# Altium PCB PCB2.PcbDoc
Units mil, origin at the board's own origin, x right, y up, seen from the top; angles counter-clockwise.
Board outline 3975 x 1155 mil, 2 copper layers (Top Layer, Bottom Layer); 12 components, 19 nets, 65 pads, 5 vias.
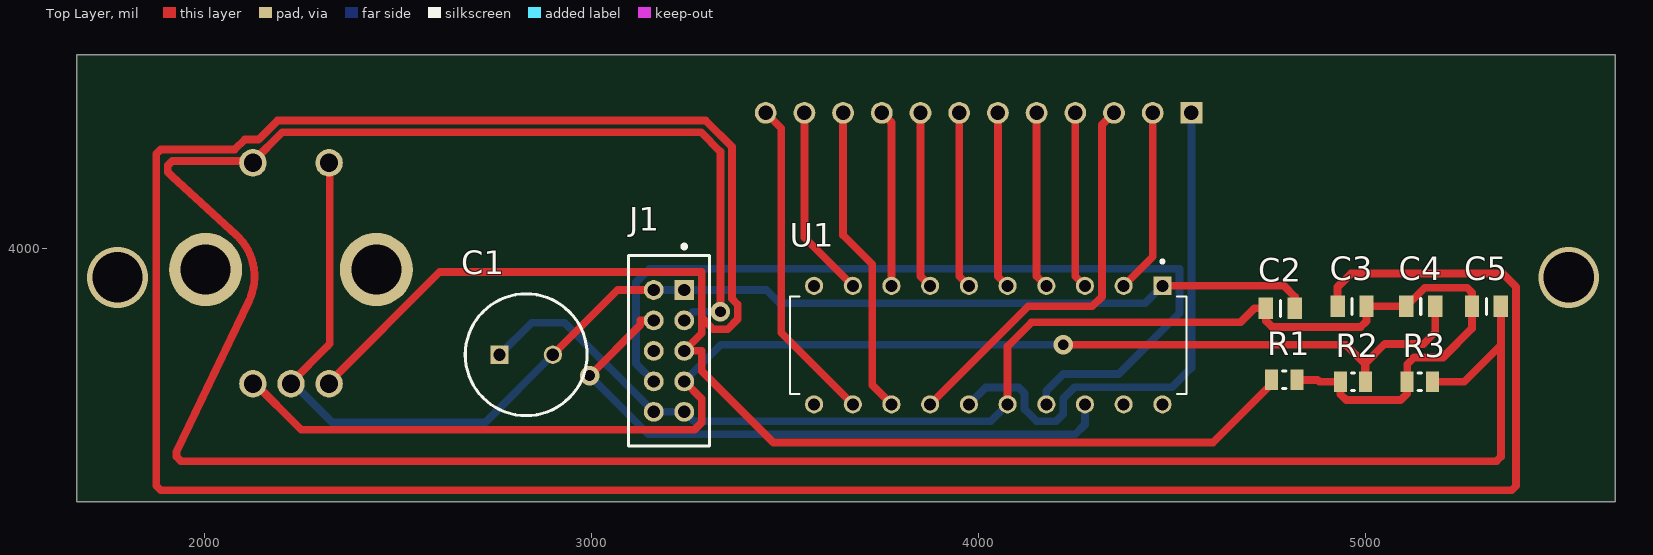
[diagram p0: Top Layer view]
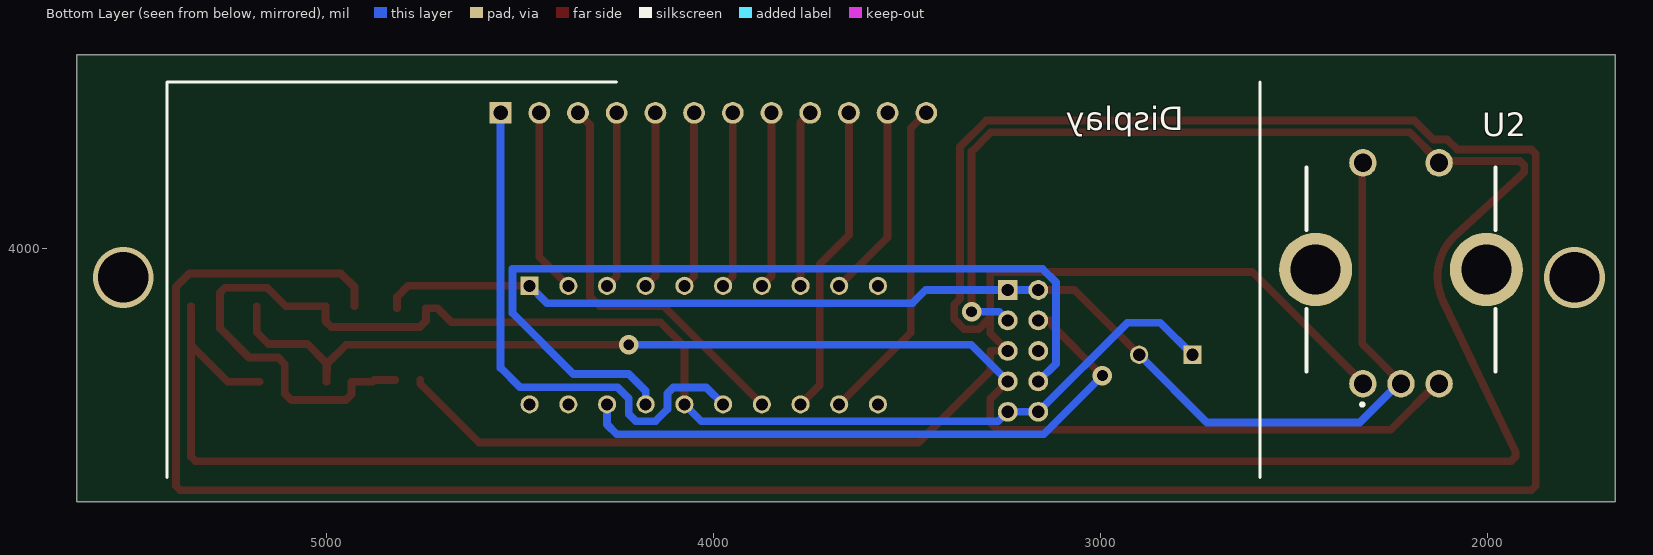
[diagram p1: Bottom Layer view, seen from below]
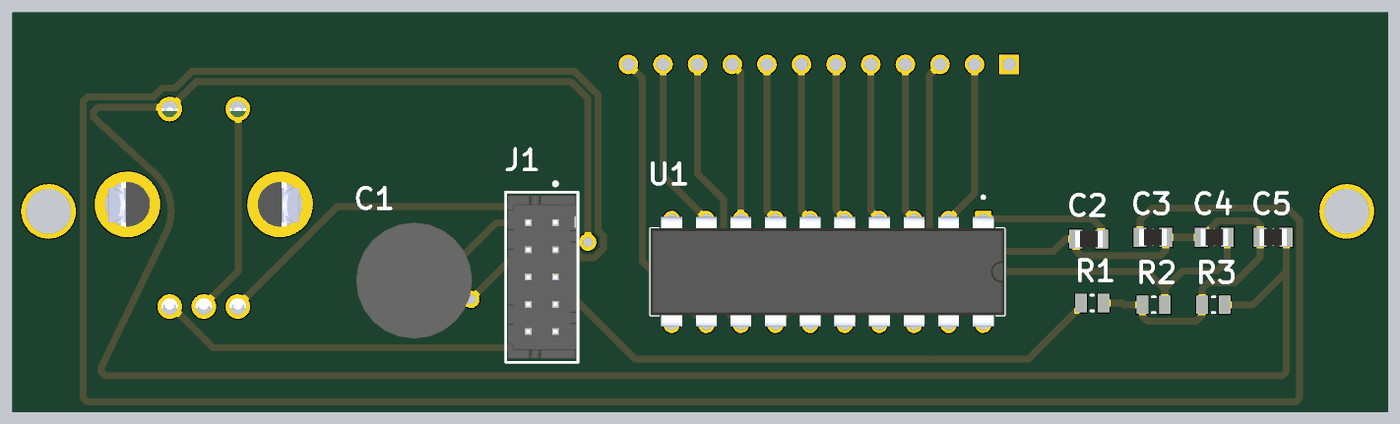
[diagram p2: 3D render of the assembled board from above, using the file's embedded part models]

## Layer stack, top to bottom
Top Solder: solder mask 0.4, Solder Resist, Dk 3.5
Top Layer: signal copper 1.4
Dielectric 1: dielectric 12.6, FR-4, Dk 4.8
Bottom Layer: signal copper 1.4
Bottom Solder: solder mask 0.4, Solder Resist, Dk 3.5

## Board outline
1670,3345 5645,3345 5645,4500 1670,4500

## Design rules (kind name [scope] priority, off if disabled: settings)
Clearance [All] p1: gap=10 ignorepadtopadclearanceinfootprint=FALSE
PolygonConnect [All] p1: connectstyle=Relief reliefconductorwidth=10 reliefentries=4 polygonreliefangle="90 Angle" airgapwidth=10
RoutingVias [All] p1: holewidth=28 width=50 viastyle="Through Hole" minholewidth=28 minwidth=50 maxholewidth=28 maxwidth=50
SolderMaskExpansion [All] p1: expansion=4 istentingtop=FALSE
Width [All] p1: maxlimit=50 minlimit=15 preferedwidth=20 minimp=50.000000 maximp=50.000000 favimp=50.000000
30 further rules are at their usual default settings.

## Components (designator, comment, footprint, x,y, rotation, side; value= is the part's Value field where it differs from the comment)
C1 "100uF 50V" "Elco 100uF 50V" 2762.2,3725 r0 top
C2 "100 nF" 0805 4780,3845 r0 top
C3 "10 nF" 0805 4965,3850 r180 top
C4 "10 nF" 0805 5142.6,3850 r0 top
C5 "10 nF" 0805 5312.4,3850 r0 top
Display "DP1" 7sigment 4250,4350 r270 bottom (schematic designator 1)
J1 "DF11-10DP-2DSA(24)" "FP-DF11-10DP-2DSA_24-MFG - duplicate" 3200,3735 r270 top
R1 "200E" registor 4790,3660 r0 top
R2 "200E" registor 4967.48,3655 r180 top
R3 "200E" registor 5140,3655 r180 top
U1 "TM1637" TM1637 4025,3750 r270 top
U2 "PEC11R-4225F-S0024" PEC12R-4XXXF-SXXXX_1 2223.43,3945.28 r180 bottom

## Footprints (in the part's own frame and the unit in brackets; to place one, negate y for a bottom-side part, rotate by r counter-clockwise, add the part's x,y. Pads: shape width x height; smd on the part's side, far side on the other; paste and mask are expansions set on the pad)
7sigment [mm]
  rect 1.425x1.425 hole 0.95: 1(0,-7.62)
  round 1.425 hole 0.95: 2(0,-5.08) 3(0,-2.54) 4(0,0) 5(0,2.54) 6(0,5.08) 7(0,7.62) 8(0,10.16) 9(0,12.7) 10(0,15.24) 11(0,17.78) 12(0,20.32)
  silkscreen extent -2.02,-29.53 23.93,42.23
0805 [mm]
  rect 0.95x1.4 smd: 1(-0.95,0) 2(0.95,0)
  silkscreen extent 0,-0.53 0,0.53, body extent -1,-0.63 1,0.63, height 0.6
"Elco 100uF 50V" [mm]
  rect 1.2x1.2 hole 0.8: 1(0,0)
  round 1.2 hole 0.8: 2(3.5,0)
  silkscreen extent -2.25,-4 5.75,4, body extent -2.5,-4.25 6,4.25, height 12.5
"FP-DF11-10DP-2DSA_24-MFG - duplicate" [mm]
  rect 1.3x1.3 hole 0.8 paste-2539.97 mask+0: 1(-4,1)
  round 1.3 hole 0.8 paste-2539.97 mask+0: 2(-4,-1) 3(-2,1) 4(-2,-1) 5(0,1) 6(0,-1) 7(2,1) 8(2,-1) 9(4,1) 10(4,-1)
  silkscreen extent -6.97,-2.65 6.25,2.65, body extent -6.35,-2.75 6.35,2.75, height 0.25
PEC12R-4XXXF-SXXXX_1 [mm]
  round 1.8 hole 1.2: 1(-2.5,-7.5) 2(2.5,-7.5) 3(0,-7.5) 4(-2.5,7) 5(2.5,7)
  round 4.8 hole 3.28: 6(5.6,0) 7(-5.6,0)
  silkscreen extent -6.2,-8.95 6.2,6.7, body extent -7,-7.75 6.99,7.15, height 31.51
registor [mm] "Chip Resistor, 2-Leads, Body 2.00x1.25mm, IPC High Density"
  rect 0.85x1.35 smd: 1(-0.825,0) 2(0.825,0)
  silkscreen extent -0.1,-0.58 0.1,0.58, body extent -1.1,-0.72 1.1,0.72, height 0.5
TM1637 [mm]
  rect 1.19x1.19 hole 0.79: 1(-3.89,11.43)
  round 1.19 hole 0.79: 2(-3.89,8.89) 3(-3.89,6.35) 4(-3.89,3.81) 5(-3.89,1.27) 6(-3.89,-1.27) 7(-3.89,-3.81) 8(-3.89,-6.35) 9(-3.89,-8.89) 10(-3.89,-11.43) 11(3.89,-11.43) 12(3.89,-8.89) 13(3.89,-6.35) 14(3.89,-3.81) 15(3.89,-1.27) 16(3.89,1.27) 17(3.89,3.81) 18(3.89,6.35) 19(3.89,8.89) 20(3.89,11.43)
  silkscreen extent -5.58,-13 3.2,13, body extent -4.03,-13 4.03,13, height 4.31

## Part data
C1: library part "condensator 100uF 50V", Manufacturer="AVX Interconnect / Elco", Part Number=02015A270JAT2A
C2 C3 C4 C5: library part "Condensator 0805", "Chip Multilayer Ceramic Capacitors for General Purpose, 0805, 10uF, X5R, 15%, 10%, 25V", Capacitance=10uF, Case Code (Imperial)=0805, Case Code (Metric)=2012, Dielectric=X5R, Max Operating Temperature=85°C, Min Operating Temperature=-55°C, Package Quantity=1, Tolerance=10%, Voltage=25V, Case/Package=0805, Depth=1.25mm, Height=1.25mm, Lead Free="Lead Free", Length=2mm, Material=Ceramic, Mount="Surface Mount", Packaging="Tape and Reel", Radiation Hardening=No, Termination=SMD/SMT, Thickness=0.053inch, Voltage Rating=25V, Voltage Rating (DC)=25V, Width=0.049inch
Display: library part 7sigment
J1: library part CMP-11610-000008-1, "CONN HEADER VERT 10POS 2MM", Current Rating=2A, Manufacturer=Hirose, Temperature="-40°C to +85°C", Temperature Range High=+85°C, Temperature Range Low=-40°C, Voltage Rating=250V, Automotive=No, Category=Conn, ComponentLink2Description=Datasheet, ComponentLink2URL=https://www.hirose.com/product/document?clcode=CL0543-0520-0-24&productname=DF11-10DP-2DSA(24)&series=DF11&documenttype=Catalog&lang=en&documentid=D31688_en, Conn Gender=Male, Conn Orientation=Straight, Contact Material=Tin,Nickel, Device Class L1=Connectors, Device Class L2="Headers and Wire Housings", Device Class L3=unset, Digikey Description="CONN HEADER VERT 10POS 2MM", Footprint Url=https://www.hirose.com/product/document?clcode=CL0543-0520-0-24&productname=DF11-10DP-2DSA(24)&series=DF11&documenttype=2DDrawing&lang=en&documentid=0000995333, Height=6.9mm, Lead Free=Yes, Manufacturer Part Number=DF11-10DP-2DSA(24), Mouser Description="Headers & Wire Housings 10P STRT HEADER THRU HL,BD MNT,SN", Number Of Contacts=10, Number Of Rows=2, Octopart=https://octopart.com/df11-10dp-2dsa%2824%29-hirose-39521433, Package=DF11-10DP-2DSA(24), Pitch=2mm, RoHS=TRUE
R1 R2 R3: library part resistor, Manufacturer="Vishay Dale", Part Number=CRCW08050000Z0EA
U1: "LED Drive Control Special Circuit", Package=Package, Availability="Not in stock", Check_prices=https://www.snapeda.com/parts/TM1637/Titan+Micro+Electronics/view-part/?ref=eda, MF="Titan Micro Electronics", MP=TM1637, Price=None, SnapEDA_Link=https://www.snapeda.com/parts/TM1637/Titan+Micro+Electronics/view-part/?ref=snap
U2: library part encoder, "Rotary Button", Manufacturer_Name=Bourns, Mouser Part Number=652-PEC11R-4225F-S24, Arrow Part Number=PEC11R-4225F-S0024, Arrow Price/Stock=https://www.arrow.com/en/products/pec11r-4225f-s0024/bourns?region=nac, Datasheet Link=https://componentsearchengine.com/Datasheets/1/PEC11R-4225F-S0024.pdf, Manufacturer_Part_Number=PEC11R-4225F-S0024, Mouser Price/Stock=https://www.mouser.co.uk/ProductDetail/Bourns/PEC11R-4225F-S0024?qs=Zq5ylnUbLm4N6UNkPX3pkQ%3D%3D

## Via types
v1: diameter 50, hole 28, Top Layer to Bottom Layer, 3 vias
v2: diameter 157.48/157.48 (per signal layer), hole 129.92, Top Layer to Bottom Layer, 2 vias

## Nets (pads, with @x,y where several pads share a name; then routed paths per layer and width w, separated by ;. In a path a pad name is that pad's centre, name@x,y a point inside that pad or via, vN(x,y) a via of type N, cw(c..) or ccw(c..) an arc to the next point about the centre after c; other vN are vias at no path point)
Net1_1: Display.1 U1.15 | length 1392.7
  Bottom Layer w20: U1.15 4018.43,3640.28 4103.72,3640.28 4119,3625 4119,3584 4150,3553 4200,3553 4219,3572 4219,3612 4248,3641 4500,3641 4550,3691 Display.1
Net1_2: Display.2 U1.2 | length 477.9
  Top Layer w20: U1.2 4450,3978.15 Display.2
Net1_3: Display.3 U1.14 | length 1047.1
  Top Layer w20: U1.14 4128.15,3850 4294,3850 4319,3875 4319,4319 Display.3
Net1_4: Display.4 U1.3 | length 457.2
  Top Layer w20: Display.4 4250,3928.15 U1.3
Net1_5: Display.5 U1.4 | length 457.2
  Top Layer w20: Display.5 4150,3928.15 U1.4
Net1_6: Display.6 U1.5 | length 457.2
  Top Layer w20: Display.6 4050,3928.15 U1.5
Net1_7: Display.7 U1.6 | length 457.2
  Top Layer w20: Display.7 3950,3928.15 U1.6
Net1_8: Display.8 U1.7 | length 457.2
  Top Layer w20: Display.8 3850,3928.15 U1.7
Net1_9: Display.9 U1.8 | length 457.2
  Top Layer w20: Display.9 3775,4325 U1.8
Net1_10: Display.10 U1.13 | length 804.9
  Top Layer w20: Display.10 3650,4034.09 3725,3959.09 3725,3646.85 U1.13
Net1_11: Display.11 U1.9 | length 498.6
  Top Layer w20: Display.11 3550,4028.15 U1.9
Net1_12: Display.12 U1.12 | length 846.3
  Top Layer w20: Display.12 3490,4310 3490,3781.85 U1.12
NetC1_1: C1.1 C2.1 C3.1 C4.1 C5.1 J1.9 J1.10 R1.2 R2.2 R3.2 U1.16 | length 3676.1
  Top Layer w20: U1.16 4075,3747 4137,3809 4677,3809 4713,3845 C2.1 4742.6,3812.5 4758.1,3797 4987.5,3797 5002.4,3811.9 C3.1 C4.1 5153.2,3898 5262.5,3898 5275,3885.5 C5.1 5275,3793 5200,3718 5125,3718 5107.52,3700.52 R3.2 5107.52,3625 5090.52,3608 4950,3608 4935,3623 R2.2 4881,3655 4876,3660 R1.2
  Bottom Layer w20: C1.1 2845.2,3808 2930.15,3808 J1.10 J1.9 3263.89,3553 4031.15,3553 U1.16
NetC1_2: C1.2 C2.2 J1.1 J1.2 U1.1 U2.3 U2.4 | length 3463.8
  Top Layer w20: U2.3@2225,3654.72 2317.57,3747.29 2323.43,3753.15 U2.4@2323.43,4225.59 ; C1.2 3067.48,3892.48 J1.2 ; U1.1 4789.25,3903.15 4817.4,3875 C2.2
  Bottom Layer w20: U2.3@2225,3654.72 2329.72,3550 2725,3550 C1.2 ; J1.2 J1.1 3451.52,3892.48 3485.85,3858.15 4430,3858.15 U1.1
NetC3_2: C3.2 J1.5 R1.1 U2.1 | length 10571.2
  Top Layer w20: U2.1@2323.43,3654.72 2607.7,3939 3285,3939 3285,3817.36 3285,3780.63 J1.5 3285,3735 3285,3683.07 3470.07,3498 4605.52,3498 4757.52,3650 R1.1 ; 3288,3817.36 3314.36,3791 3351.64,3791 3378,3817.36 3378,3854.64 3363,3869.64 3363,4262.43 3295.43,4330 2188.56,4330 2139.58,4281.02 2103.61,4281.02 2078.18,4255.59 1886.72,4255.59 1880.86,4249.73 1875,4243.87 1875,3386.72 1886.72,3375 5377.28,3375 5389,3386.72 5389,3900 5354,3935 4962.6,3935 4927.6,3900 C3.2
NetC4_2: C4.2 J1.7 R2.1 U2.2 | length 3537.4
  Top Layer w20: U2.2@2126.57,3654.72 2250.3,3531 3265.96,3531 3284.96,3550 3284.96,3610.67 J1.7 ; v1(4219,3751) 4948.96,3751 4998.48,3701.48 ; C4.2 5180,3783 5150,3753 5050,3753 4998.48,3701.48 ; 4998.48,3701.48 4999.96,3700 R2.1 4998.48,3701.48
  Bottom Layer w20: J1.7 3334.11,3751 v1(4219,3751)
NetC5_2: C5.2 J1.3 R3.1 U2.5 | length 6925.8
  Top Layer w20: v1(3333,3836) 3333,4250 3283,4300 2200.98,4300 2126.57,4225.59 1916.72,4225.59 1905,4213.87 1905,4197.31 1916.72,4185.59 2081.83,4034.45 cw(c1983.51,3927.04) 2114.78,3864.01 1927.75,3474.55 1927.75,3470 1927.75,3461.72 1933.61,3455.86 1939.47,3450 5338.09,3450 5349.8,3461.72 5349.8,3750 ; R3.1 5254.8,3655 5349.8,3750 ; C5.2 5349.8,3750
  Bottom Layer w20: J1.3 3261.63,3836 v1(3333,3836)
NetJ1_4: J1.4 U1.18 | length 1636.7
  Top Layer w20: v1(2995,3671) 3126,3802 3126,3813.74 J1.4
  Bottom Layer w20: v1(2995,3671) 3146.23,3519.77 4250,3519.77 4275,3544.77 U1.18
NetJ1_8: J1.8 U1.17 | length 2269.8
  Bottom Layer w20: J1.8 3115,3701.89 3115,3912 3150,3947 4519,3947 4519,3832 4362.37,3675.37 4218.9,3675.37 4175,3631.48 U1.17
pads on no net: J1.6 U1.10 U1.11 U1.19 U1.20 U2.6 U2.7
copper on no net:
  other v2: 1775,3925 5525,3925